# EAGLE board RPi Controller (EAGLE 6.5.0)
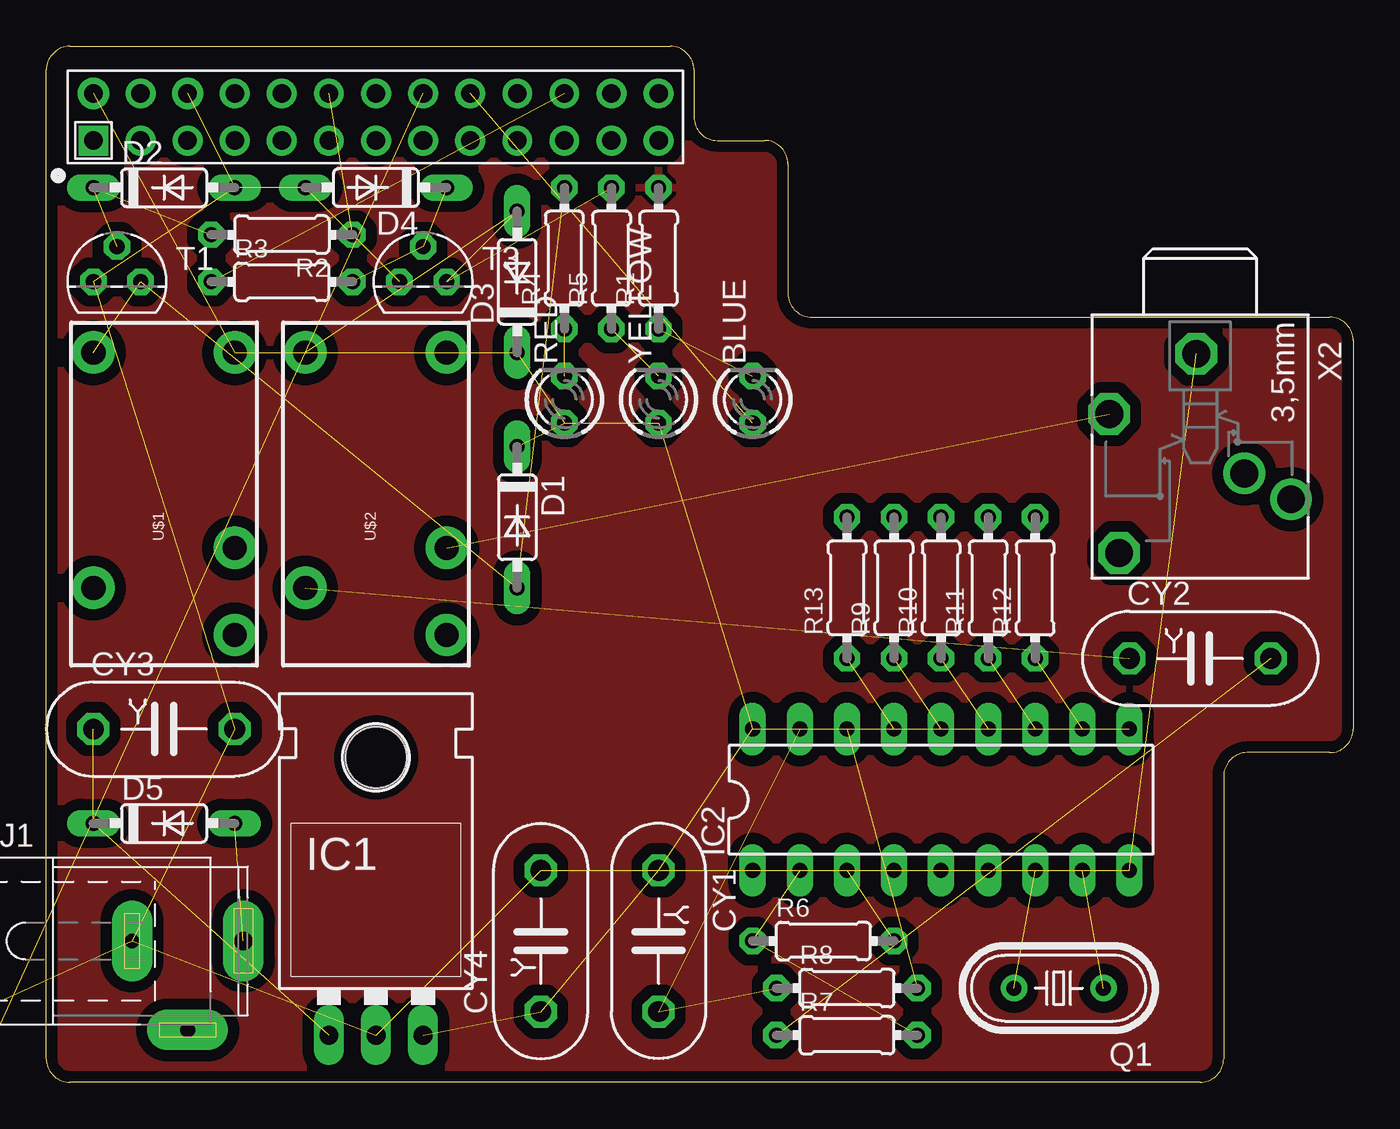
[diagram p0: board, top side]
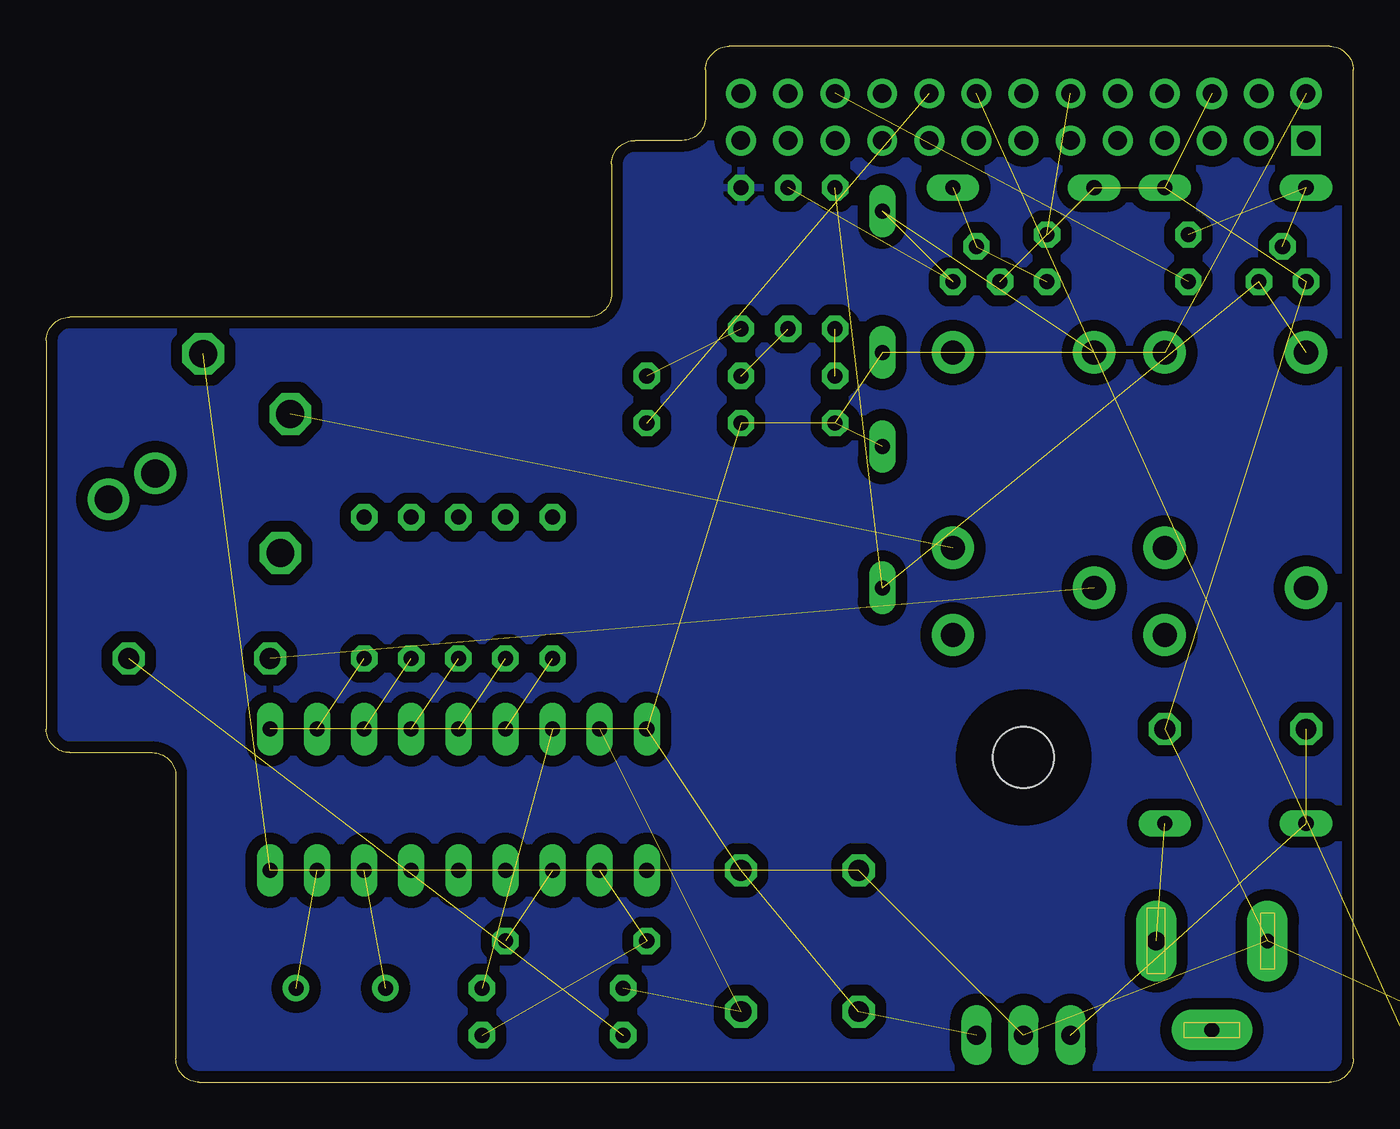
[diagram p1: board, bottom side, seen from below]

Size 70.48 x 55.88 mm. Coordinates in mm from the lower left corner, seen from the top.
Outline: 0,1.27 0,54.61 arc-90 1.27,55.88 33.66,55.88 arc-90 34.92,54.61 34.92,52.07 arc90 36.2,50.8 38.73,50.8 arc-90 40.01,49.53 40.01,42.55 arc90 41.27,41.27 69.22,41.27 arc-90 70.48,40.01 70.48,19.05 arc-90 69.22,17.78 64.77,17.78 arc90 63.5,16.51 63.5,1.27 arc-90 62.23,0 1.27,0 arc-90 0,1.27
Copper layers (1*16): Top 0.035mm / dielectric 1.5mm / Bottom 0.035mm
Design rules "SparkFun_Iteadstudio_very_conservative": minimum track width 12mil, minimum drill 20mil, track to track 12mil, track to pad 12mil, pad to pad 12mil, via to via 12mil, smd to smd 12mil, copper to edge 0.5mm, drill to drill 8mil, minimum pad ring 12mil, minimum via ring 12mil, stop-mask expansion 4mil, vias tented up to drill 25mil, thermal gap 10mil
Net classes: 1 power: width 0.381 mm; 2 5V: width 0.381 mm; 3 antenna: width 0.61 mm

## Footprints (pad centres in the part's own frame; a part is rotated, then mirrored left to right if it is on the bottom)
LED3MM = drill 0.813 octagon: A -1.27,0; K 1.27,0
YC7B5 = drill 1.118 octagon: 1 -3.81,0; 2 3.81,0
DO35-7 = drill 0.813 long: A 3.81,0; C -3.81,0
TO-220-ALT = drill 1.016 long: GND 0,-3.81; IN -2.54,-3.81; OUT 2.54,-3.81 | hole 3.302: 0,11.176
DIL18 = drill 0.813 long: 1 -10.16,-3.81; 2 -7.62,-3.81; 3 -5.08,-3.81; 4 -2.54,-3.81; 5 0,-3.81; 6 2.54,-3.81; 7 5.08,-3.81; 8 7.62,-3.81; 9 10.16,-3.81; 10 10.16,3.81; 11 7.62,3.81; 12 5.08,3.81; 13 2.54,3.81; 14 0,3.81; 15 -2.54,3.81; 16 -5.08,3.81; 17 -7.62,3.81; 18 -10.16,3.81
SPC4077 = drill 0.8 pad 2.184 long: 1 -3,0; 2 0,-4.8 | drill 1 pad 2.184 long: 3 3,0
DIP4 = drill 0.8: 1 -1.27,-3.81; 2 1.27,-3.81; 3 1.27,3.81; 4 -1.27,3.81
HC49U-V = drill 0.813: 1 -2.413,0; 2 2.413,0
0204/7 = drill 0.813 octagon: 1 -3.81,0; 2 3.81,0
TACTILE-PTH = drill 1.016 pad 1.88: 1 -3.251,2.261; 2 3.251,2.261; 3 -3.251,-2.261; 4 3.251,-2.261
TO92 = drill 0.813 octagon: 1 1.27,0; 2 0,1.905; 3 -1.27,0
RELAY-JZC = drill 1.3 pad 2.286: 1 3.81,-8.89; 2 -3.81,1.651; 3 -3.81,6.35; 4 3.81,3.81; 5 -3.81,-8.89
RASPBERRY-PI-HEADER = drill 1 square: 1 0,0 | drill 1 pad 1.676: 2 0,2.54; 6 5.08,2.54 | drill 1: 3 2.54,0; 4 2.54,2.54; 5 5.08,0; 7 7.62,0; 8 7.62,2.54; 9 10.16,0; 10 10.16,2.54; 11 12.7,0; 12 12.7,2.54; 13 15.24,0; 14 15.24,2.54; 15 17.78,0; 16 17.78,2.54; 17 20.32,0; 18 20.32,2.54; 19 22.86,0; 20 22.86,2.54; 21 25.4,0; 22 25.4,2.54; 23 27.94,0; 24 27.94,2.54; 25 30.48,0; 26 30.48,2.54
PG203J = drill 1.499 octagon: 1 -5.004,-0.203; 4 5.74,-4.369; 5 -1.753,-4.902 | drill 1.499: 2 2.845,4.902; 3 1.448,2.388

## Placement (x,y rotation side)
BLUE  [LED3MM]  38.1,36.83 90 top
CY1  [YC7B5]  33.02,7.62 270 top
CY2  [YC7B5]  62.23,22.86 0 top
CY3  [YC7B5]  6.35,19.05 0 top
CY4  [YC7B5]  26.67,7.62 90 top
D1  1N4148DO35-7  [DO35-7]  25.4,30.48 270 top
D2  1N4148DO35-7  [DO35-7]  6.35,48.26 0 top
D3  1N4148DO35-7  [DO35-7]  25.4,43.18 90 top
D4  1N4148DO35-7  [DO35-7]  17.78,48.26 180 top
D5  1N4148DO35-7  [DO35-7]  6.35,13.97 0 top
IC1  [TO-220-ALT]  17.78,6.35 0 top
IC2  HT9170B  [DIL18]  48.26,15.24 0 top
J1  [SPC4077]  7.62,7.62 0 top
OK1  SFH618A-2  [DIP4]  -16.51,-6.35 0 top  (outside the outline)
Q1  [HC49U-V]  54.61,5.08 180 top
R1  [0204/7]  33.02,44.45 90 top
R2  [0204/7]  12.7,45.72 180 top
R3  [0204/7]  12.7,43.18 0 top
R4  [0204/7]  27.94,44.45 90 top
R5  [0204/7]  30.48,44.45 90 top
R6  [0204/7]  41.91,7.62 0 top
R7  [0204/7]  43.18,2.54 0 top
R8  [0204/7]  43.18,5.08 0 top
R9  [0204/7]  45.72,26.67 90 top
R10  [0204/7]  48.26,26.67 90 top
R11  [0204/7]  50.8,26.67 90 top
R12  [0204/7]  53.34,26.67 90 top
R13  [0204/7]  43.18,26.67 90 top
RED  [LED3MM]  27.94,36.83 90 top
S1  [TACTILE-PTH]  -7.62,1.27 0 top  (outside the outline)
T1  2N3904  [TO92]  3.81,43.18 0 top
T3  2N3904  [TO92]  20.32,43.18 0 top
U$1  RELAYPTH4  [RELAY-JZC]  6.35,30.48 180 top
U$2  RELAYPTH4  [RELAY-JZC]  17.78,30.48 180 top
X1  P1A  [RASPBERRY-PI-HEADER]  2.54,50.8 0 top
X2  PG203J  [PG203J]  62.23,34.29 270 top
YELLOW  [LED3MM]  33.02,36.83 90 top

## Library data of the parts
BLUE RED YELLOW = led
CY1-CY4 = rcl
D1-D5 = diode
IC1 = SparkFun-PowerIC
IC2 = holtek; OC_FARNELL: unknown; OC_NEWARK: unknown
J1 = con-jack; OC_FARNELL: unknown; OC_NEWARK: unknown
OK1 = optocoupler; MF: VISHAY/TELEFUNKEN; MPN: SFH618A-2; OC_FARNELL: 6424855; OC_NEWARK: 21H7744
Q1 = crystal; OC_FARNELL: 1666969; OC_NEWARK: unknown
R1-R13 = resistor
S1 U$1 U$2 = SparkFun-Electromechanical
T1 T3 = transistor
X1 = SteveMarple
X2 = con-hirschmann; OC_FARNELL: unknown; OC_NEWARK: unknown

## Nets
DTMF_IN: CY2.1 U$2.4
GND: R1.2
N$1: BLUE.K R1.1
N$2: R4.1 RED.K
N$3: U$2.2 X2.5
N$4: D2.C R2.2 T1.2
N$5: D1.A R4.2 T1.1 U$1.1
N$6: R5.1 YELLOW.K
N$7: IC2.7 Q1.2
N$8: D4.C R3.2 T3.2
N$9: D3.A R5.2 T3.1 U$2.1
N$10: IC2.8 Q1.1
N$11: IC2.14 R9.1
N$12: IC2.2 R6.1 R7.2
N$13: IC2.13 R10.1
N$15: IC2.3 R6.2
N$16: IC2.1 IC2.4
N$17: IC2.12 R11.1
N$18: IC2.11 R12.1
N$19: IC2.15 R13.1
N$22: CY3.1 D5.C IC1.IN
N$23: IC2.16 R8.2
N$24: CY1.2 IC2.17 R8.1
N$25: CY2.2 R7.1
N$26: D5.A J1.3
PTT1: U$1.4
PTT2: U$1.3
RPI_3.3V: X1.1
RPI_5V: CY1.1 CY4.1 D1.C D3.C IC1.OUT IC2.10 IC2.18 RED.A U$1.5 U$2.5 X1.2 YELLOW.A
RPI_GPIO_PIN12: R2.1 X1.12
RPI_GPIO_PIN16: OK1.4 S1.3 S1.4 X1.16
RPI_GPIO_PIN18: BLUE.A X1.18
RPI_GPIO_PIN22: R3.1 X1.22
RPI_GRD: CY3.2 CY4.2 D2.A D4.A IC1.GND IC2.5 IC2.6 IC2.9 J1.1 OK1.3 S1.1 S1.2 T1.3 T3.3 X1.6 X2.1

## Tracks (layer width: path | path; a pad name or v marks a point on that pad's centre or on a via)
DTMF_IN  (1 unrouted)
GND
  pour Bottom (isolate 0.61): -1.27,-1.27 -1.27,57.15 72.39,57.15 72.39,-1.27
  pour Top (isolate 0.61): -2.54,-2.54 -2.54,58.42 73.66,58.42 73.66,-2.54
N$1  (1 unrouted)
N$2  (1 unrouted)
N$3  (1 unrouted)
N$4  (2 unrouted)
N$5  (3 unrouted)
N$6  (1 unrouted)
N$7  (1 unrouted)
N$8  (2 unrouted)
N$9  (3 unrouted)
N$10  (1 unrouted)
N$11  (1 unrouted)
N$12  (2 unrouted)
N$13  (1 unrouted)
N$15  (1 unrouted)
N$16  (1 unrouted)
N$17  (1 unrouted)
N$18  (1 unrouted)
N$19  (1 unrouted)
N$22  (2 unrouted)
N$23  (1 unrouted)
N$24  (2 unrouted)
N$25  (1 unrouted)
N$26  (1 unrouted)
RPI_5V  (11 unrouted)
RPI_GPIO_PIN12  (1 unrouted)
RPI_GPIO_PIN16  (3 unrouted)
RPI_GPIO_PIN18  (1 unrouted)
RPI_GPIO_PIN22  (1 unrouted)
RPI_GRD  (15 unrouted)